# Altium PCB CHILD_BOARD_revA.PcbDoc (part 3 of 3)
Units mil, origin at the board's own origin, x right, y up, seen from the top; angles counter-clockwise.
Board outline 6000 x 4000 mil, 2 copper layers (Top Layer, Bottom Layer); 312 components, 224 nets, 1180 pads, 0 vias.
Unrouted connection lines stored in the file: 721.
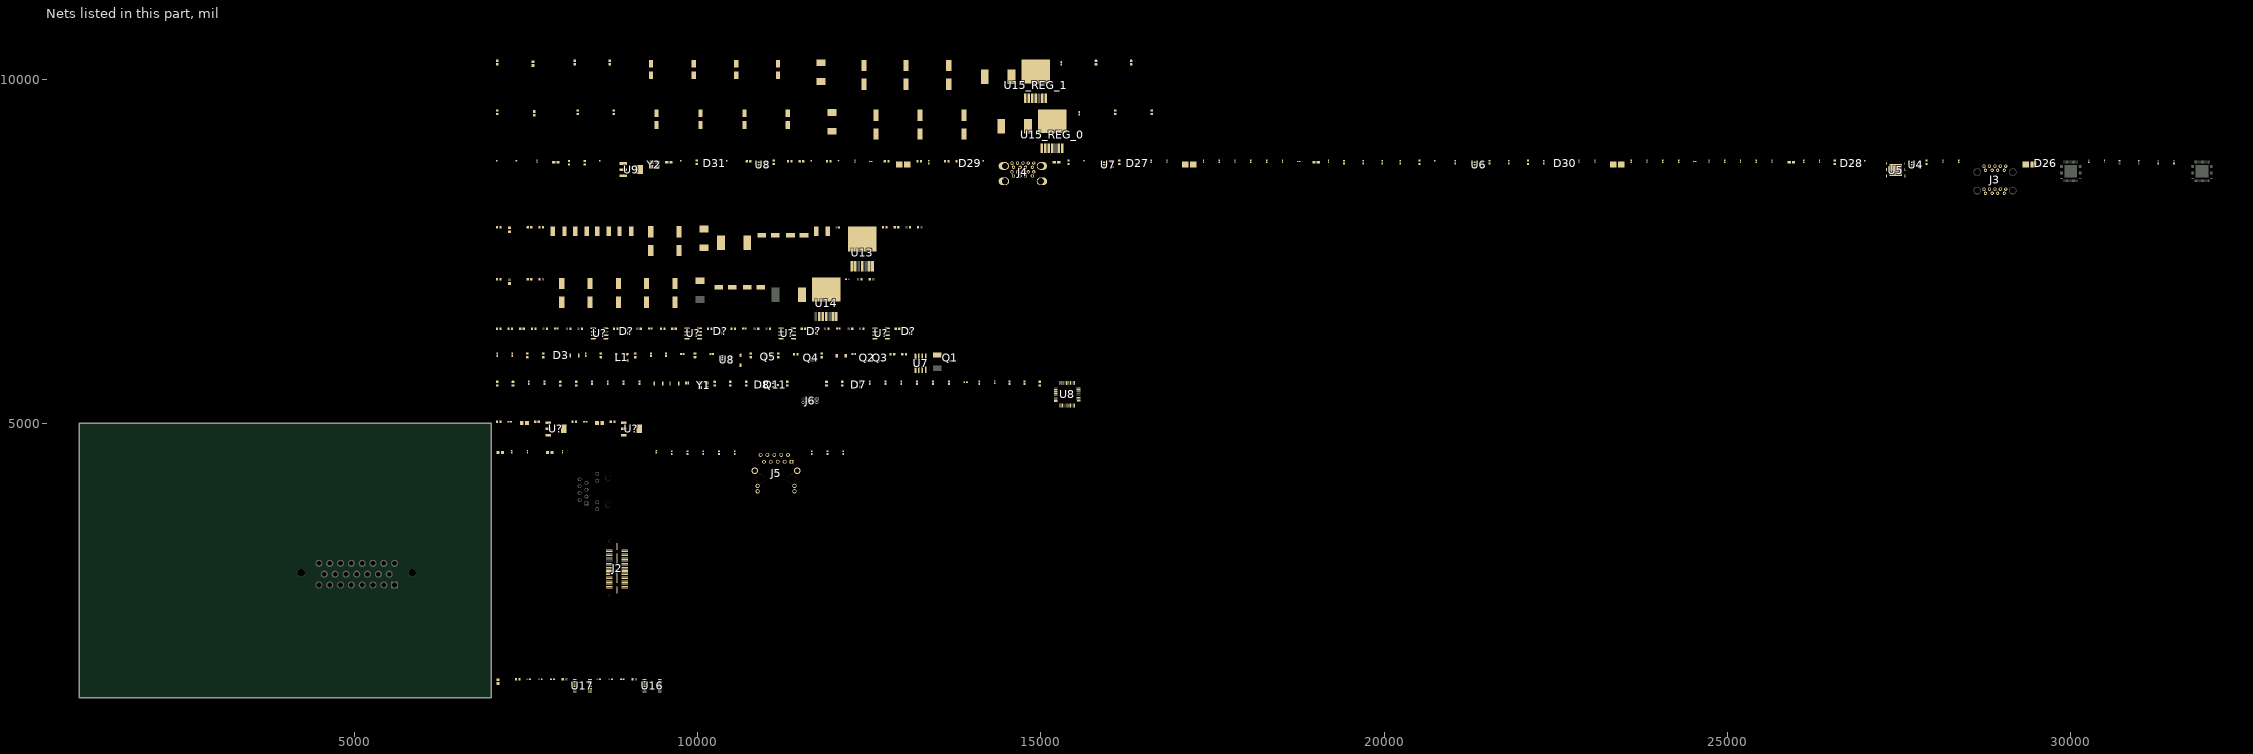
[diagram p2: the nets of this part, all layers, seen from the top]

## Nets (pads, with @x,y where several pads share a name; then routed paths per layer and width w, separated by ;. In a path a pad name is that pad's centre, name@x,y a point inside that pad or via, vN(x,y) a via of type N, cw(c..) or ccw(c..) an arc to the next point about the centre after c; other vN are vias at no path point) (continued)
pads on no net: C59.1 C60.2 C?.1@7526.16,1270 C?.1@7696.16,1270 C?.1@8546.16,1270 C?.1@8716.16,1270 C?.1@12026.16,7850 C?.2@12203.84,7095 D38.1 D?.1@8952.28,6371.5 D?.1@11687.28,6371.5 D?.1@13057.28,6371.5 D?.4@8987.72,6371.5 D?.4@10357.72,6371.5 D?.4@13092.72,6371.5 F1.1 J1. J1.1 J1.2 J1.3 J1.4 J1.5 J1.6 J1.7 J1.8 J1.9 J1.10 J1.11 J1.12 J1.13 J1.14 J1.15 J1.16 J1.17 J1.18 J1.19 J1.20 J1.21 J1.22 J1.23 J2. J2.34 J2.42 J2.44 J3.19 J3.20 J3.21 J3.22 J5. J6.07 J6.08 J6.09 J?. J?.1 J?.2 J?.3 J?.4 J?.5 J?.6 J?.7 J?.8 J?.9 J?.10 J?.11 J?.12 L10.1 R32.2@31505,8819.69 R33.2@31275,8819.69 R135.2 R184.1 R185.1 R?.1@7759.41,6375 R?.1@8099.41,6375 R?.1@8269.41,6375 R?.1@9124.41,6375 R?.1@10834.41,6375 R?.1@11004.41,6375 R?.1@11859.41,6375 R?.1@12204.41,6375 R?.1@12339.41,7095 R?.1@12369.41,6375 R?.1@13044.41,7850 R?.2@7750.59,7095 R?.2@8090.59,1270 R?.2@9105.59,1270 R?.2@12560.59,7095 R?.2@13265.59,7850 U5.45 U5.46 U5.48 U8.2@15218.66,5508.58 U8.7@10364.25,5865.93 U8.8@15218.66,5390.47 U8.9@15218.66,5370.79 U8.16 U8.17 U8.18 U8.22 U8.25 U8.30 U8.31 U8.32 U8.39 U8.41 U8.44 U8.46 U13.3 U13.5 U14.1 U14.5 U15_REG_0.5 U15_REG_1.5 U16.13 U17.13 U?.1@29864.12,8767.36 U?.1@31774.12,8767.36 U?.2@29864.12,8751.61 U?.2@31774.12,8751.61 U?.3@29864.12,8735.87 U?.3@31774.12,8735.87 U?.4@29864.12,8720.12 U?.4@31774.12,8720.12 U?.5@29864.12,8704.37 U?.5@31774.12,8704.37 U?.6@29864.12,8688.62 U?.6@31774.12,8688.62 U?.7@8666.18,6330 U?.7@11401.18,6330 U?.7@12766.18,6330 U?.7@29864.12,8672.87 U?.7@31774.12,8672.87 U?.8@29864.12,8657.13 U?.8@31774.12,8657.13 U?.9 U?.10 U?.11 U?.12 U?.13 U?.14 U?.15 U?.16 U?.17 U?.18 U?.19 U?.20 U?.21 U?.22 U?.23 U?.24 U?.25 U?.26 U?.27 U?.28 U?.29 U?.30 U?.31 U?.32 U?.33 U?.34 U?.35 U?.36 U?.37 U?.38 U?.39 U?.40 U?.41 U?.42 U?.43 U?.44 U?.45 U?.46 U?.47 U?.48 U?.49 U?.50 U?.51 U?.52 U?.53 U?.54 U?.55 U?.56 U?.57

## Text inside footprints (layer, text, board x,y; h text height)
J3: Top 3D Body "*" at 28644.86,8321.77 h50; Top Overlay "*" at 28644.86,8321.77 h50
U8: Top 3D Body "*" at 10386,5956.5 h50; Top Overlay "*" at 10341.75,5991.07 h50